# Allegro board bottom.brd
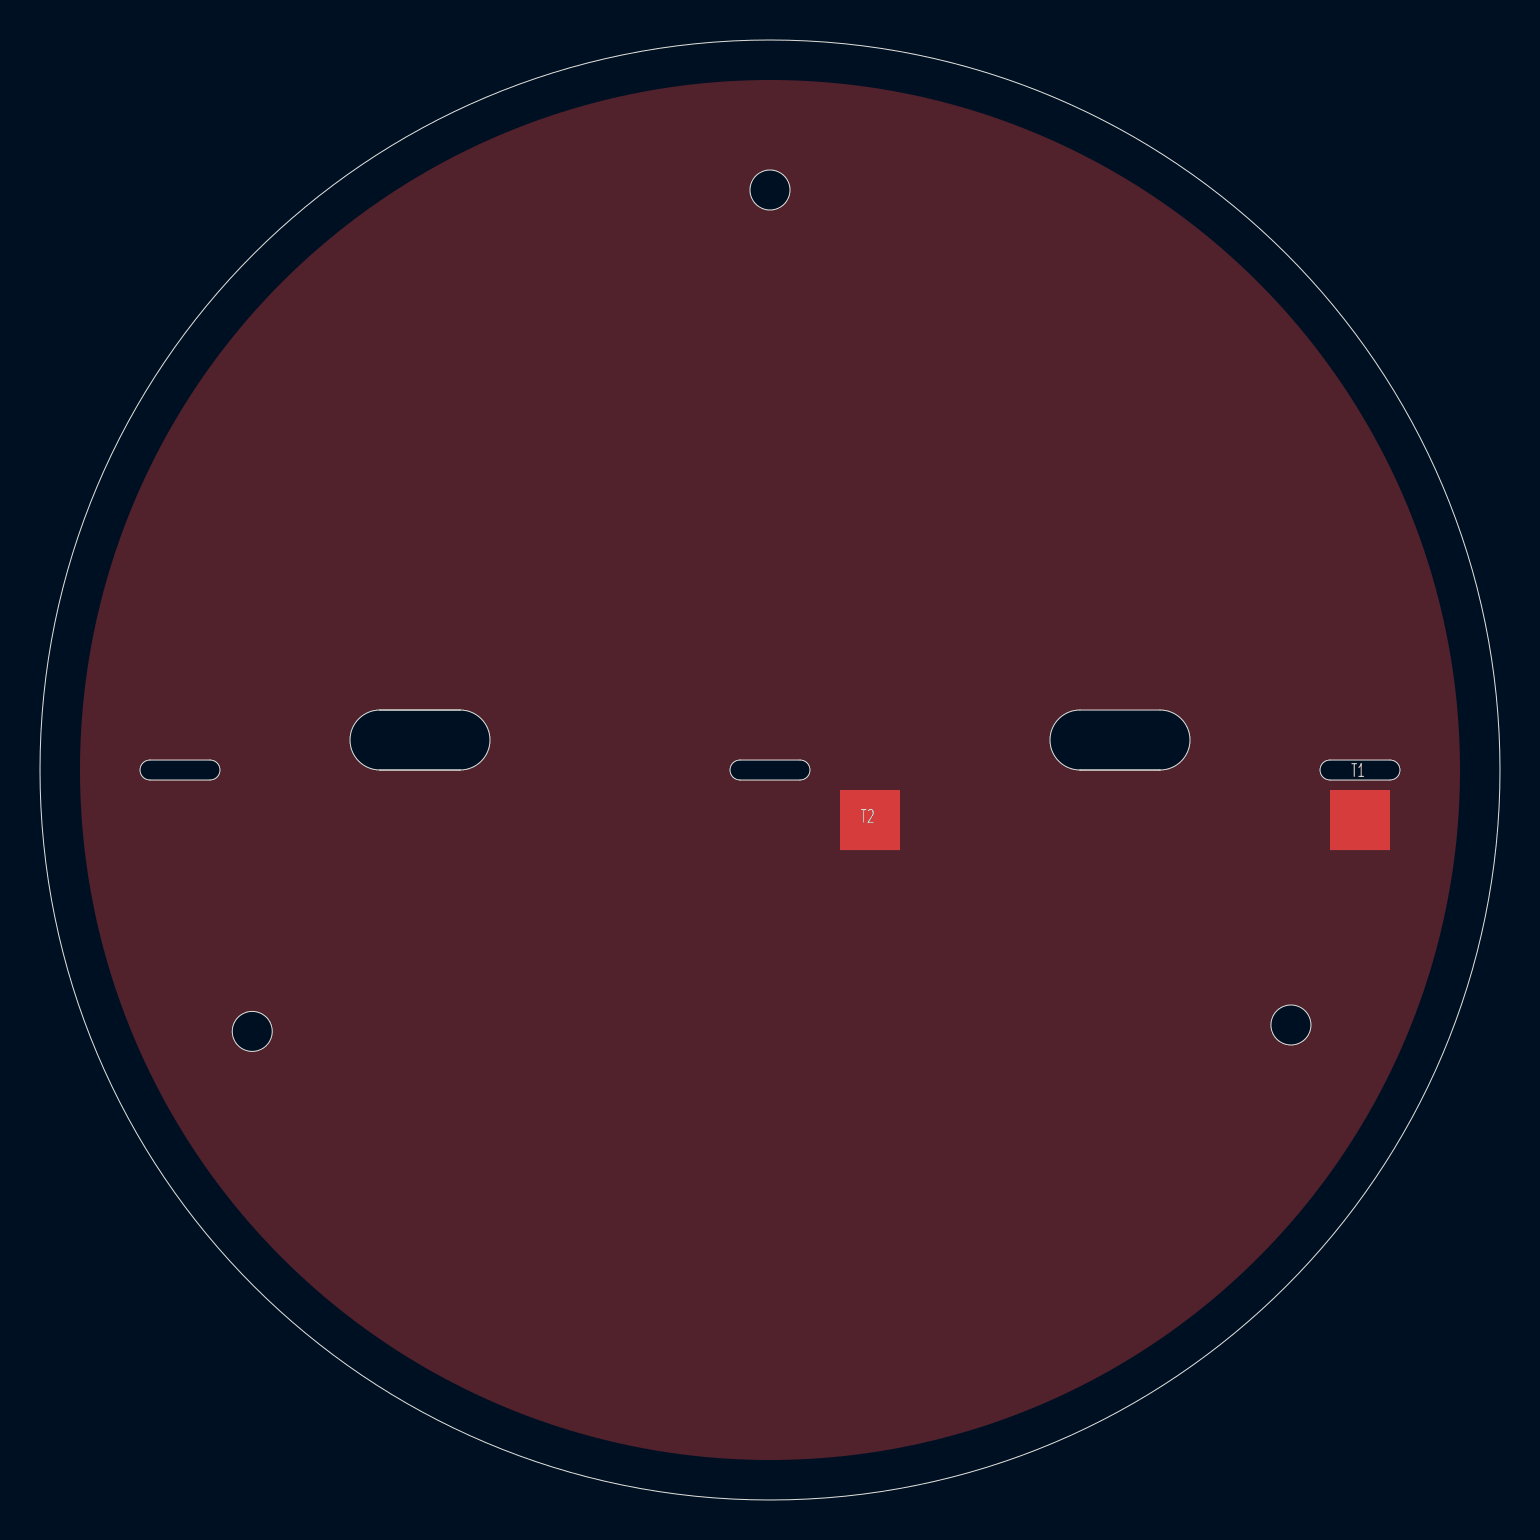
[diagram p0: board, top side]
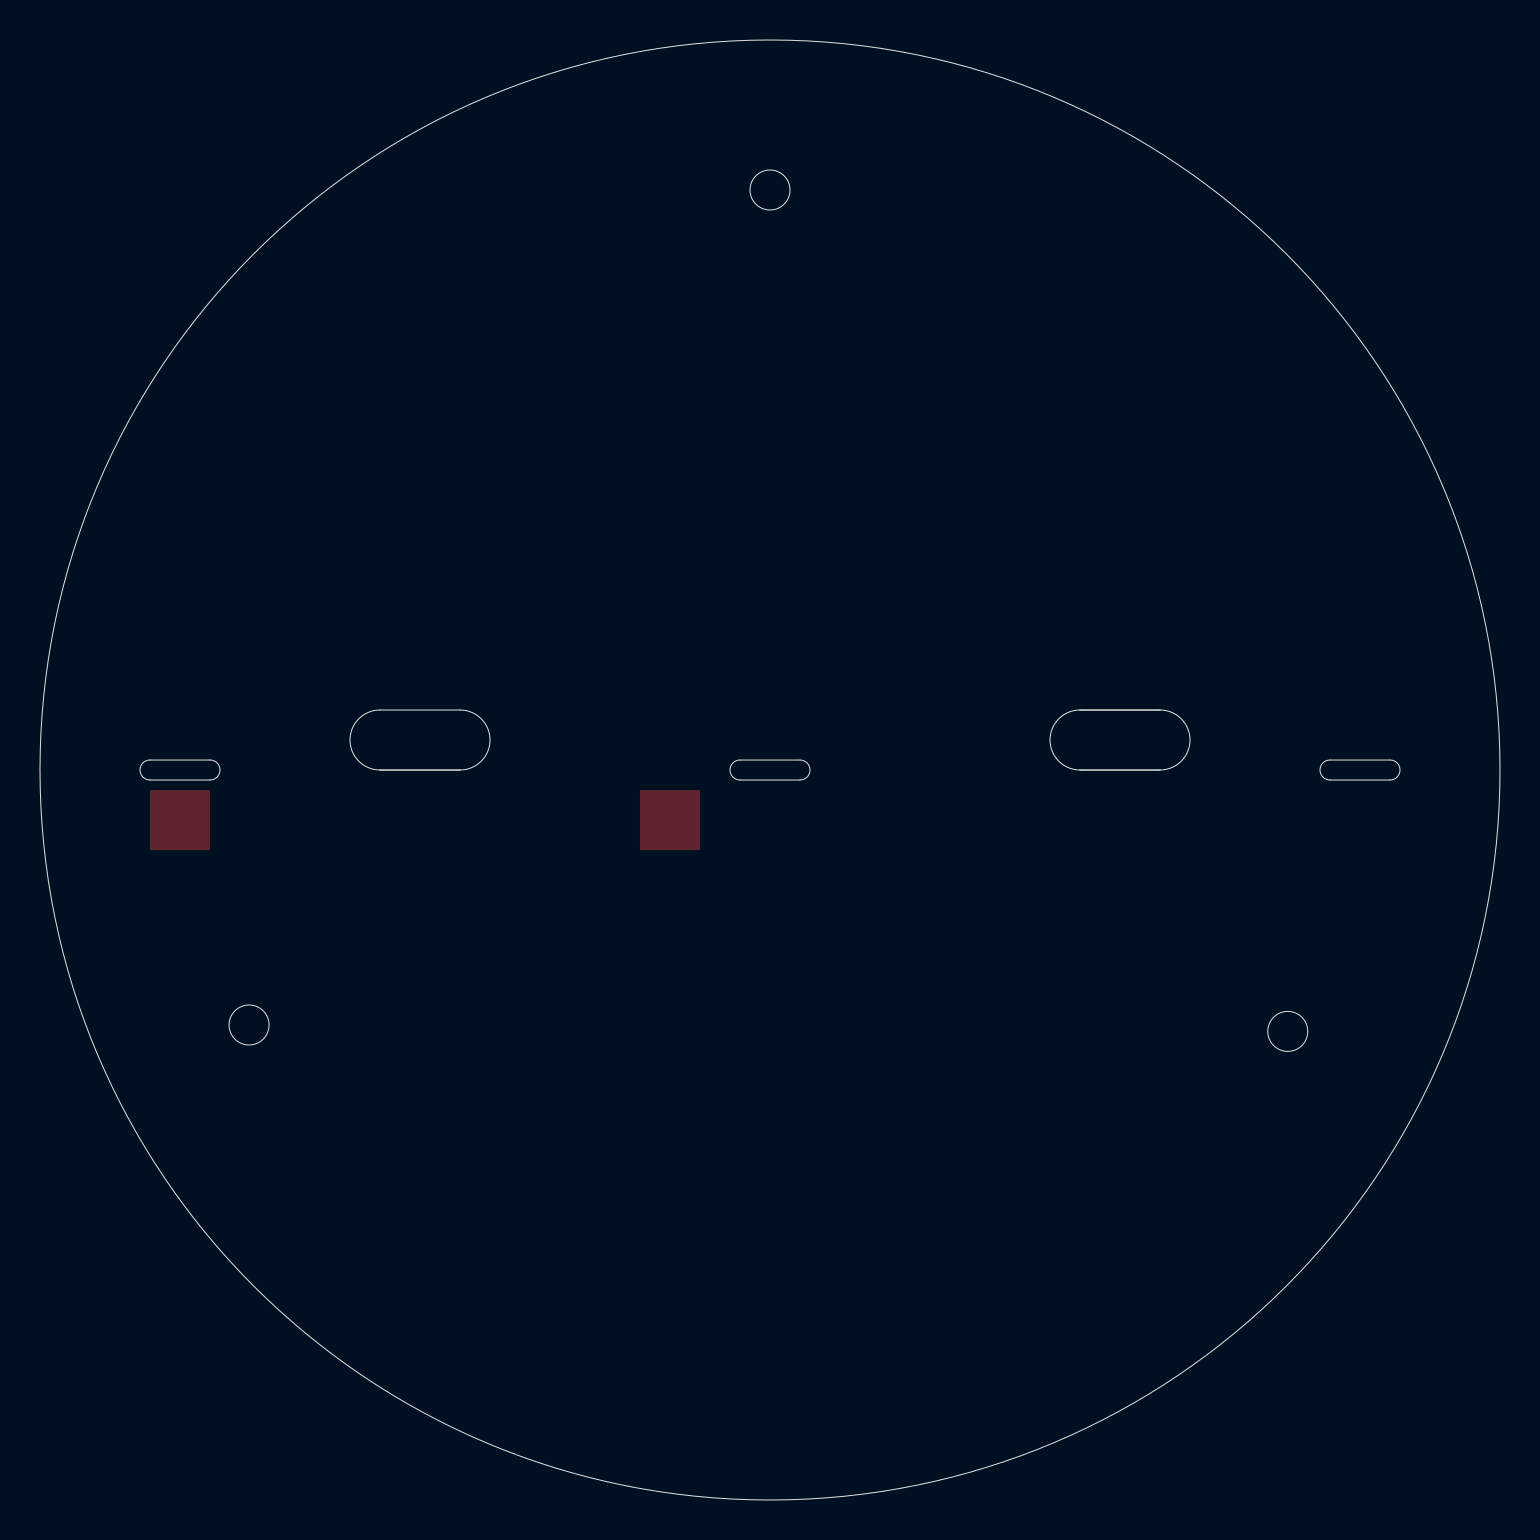
[diagram p1: board, bottom side, seen from below]

Outline 73 x 73 mm; copper layers: TOP, BOTTOM. Coordinates in mm from the lower left corner of the outline.
Outline path: circle c10.61,23.43 r1 ; circle c36.5,65.5 r1 ; circle c36.5,36.5 r36.5 ; circle c62.55,23.75 r1 ; 17,39.5 21,39.5 ; 17,39.5 arc(15.5,38) 17,36.5 ; 17,39.5 21,39.5 ; 21,39.5 arc(22.5,38) 21,36.5 ; 17,36.5 21,36.5 ; 17,36.5 21,36.5 ; 52,36.5 arc(50.5,38) 52,39.5 56,39.5 arc(57.5,38) 56,36.5 ; 52,36.5 56,36.5 ; 52,36.5 56,36.5 ; 5.5,36 arc(5,36.5) 5.5,37 8.5,37 arc(9,36.5) 8.5,36 5.5,36 ; 35,36 arc(34.5,36.5) 35,37 38,37 arc(38.5,36.5) 38,36 35,36 ; 64.5,36 arc(64,36.5) 64.5,37 67.5,37 arc(68,36.5) 67.5,36 64.5,36

## Placement (name value [footprint] x y rotation side)
T1  TEST  [TP_3X3]  66 33.99 0 top
T2  TEST  [TP_3X3]  41.5 33.99 0 top

## Library data of the parts
T1 T2 = TEST

## Footprints (pads in the part's own frame, mm; a bottom-side part is the same pattern mirrored in y, then rotated)
TP_3X3
  rect 3x3 smd: 1(0,0)

## Nets
GND: T1.1(TP) T2.1(TP)

## Copper pours and planes (outline as drawn; the poured copper is in the pictures)
GND on TOP: 2,36.5 71,36.5
